# Altium PCB PD.PcbDoc
Units mil, origin at the board's own origin, x right, y up, seen from the top; angles counter-clockwise.
Board outline 1528 x 1869 mil, 2 copper layers (Top Layer, Bottom Layer), stack 12.8 mil thick; 65 components, 43 nets, 225 pads, 107 vias.
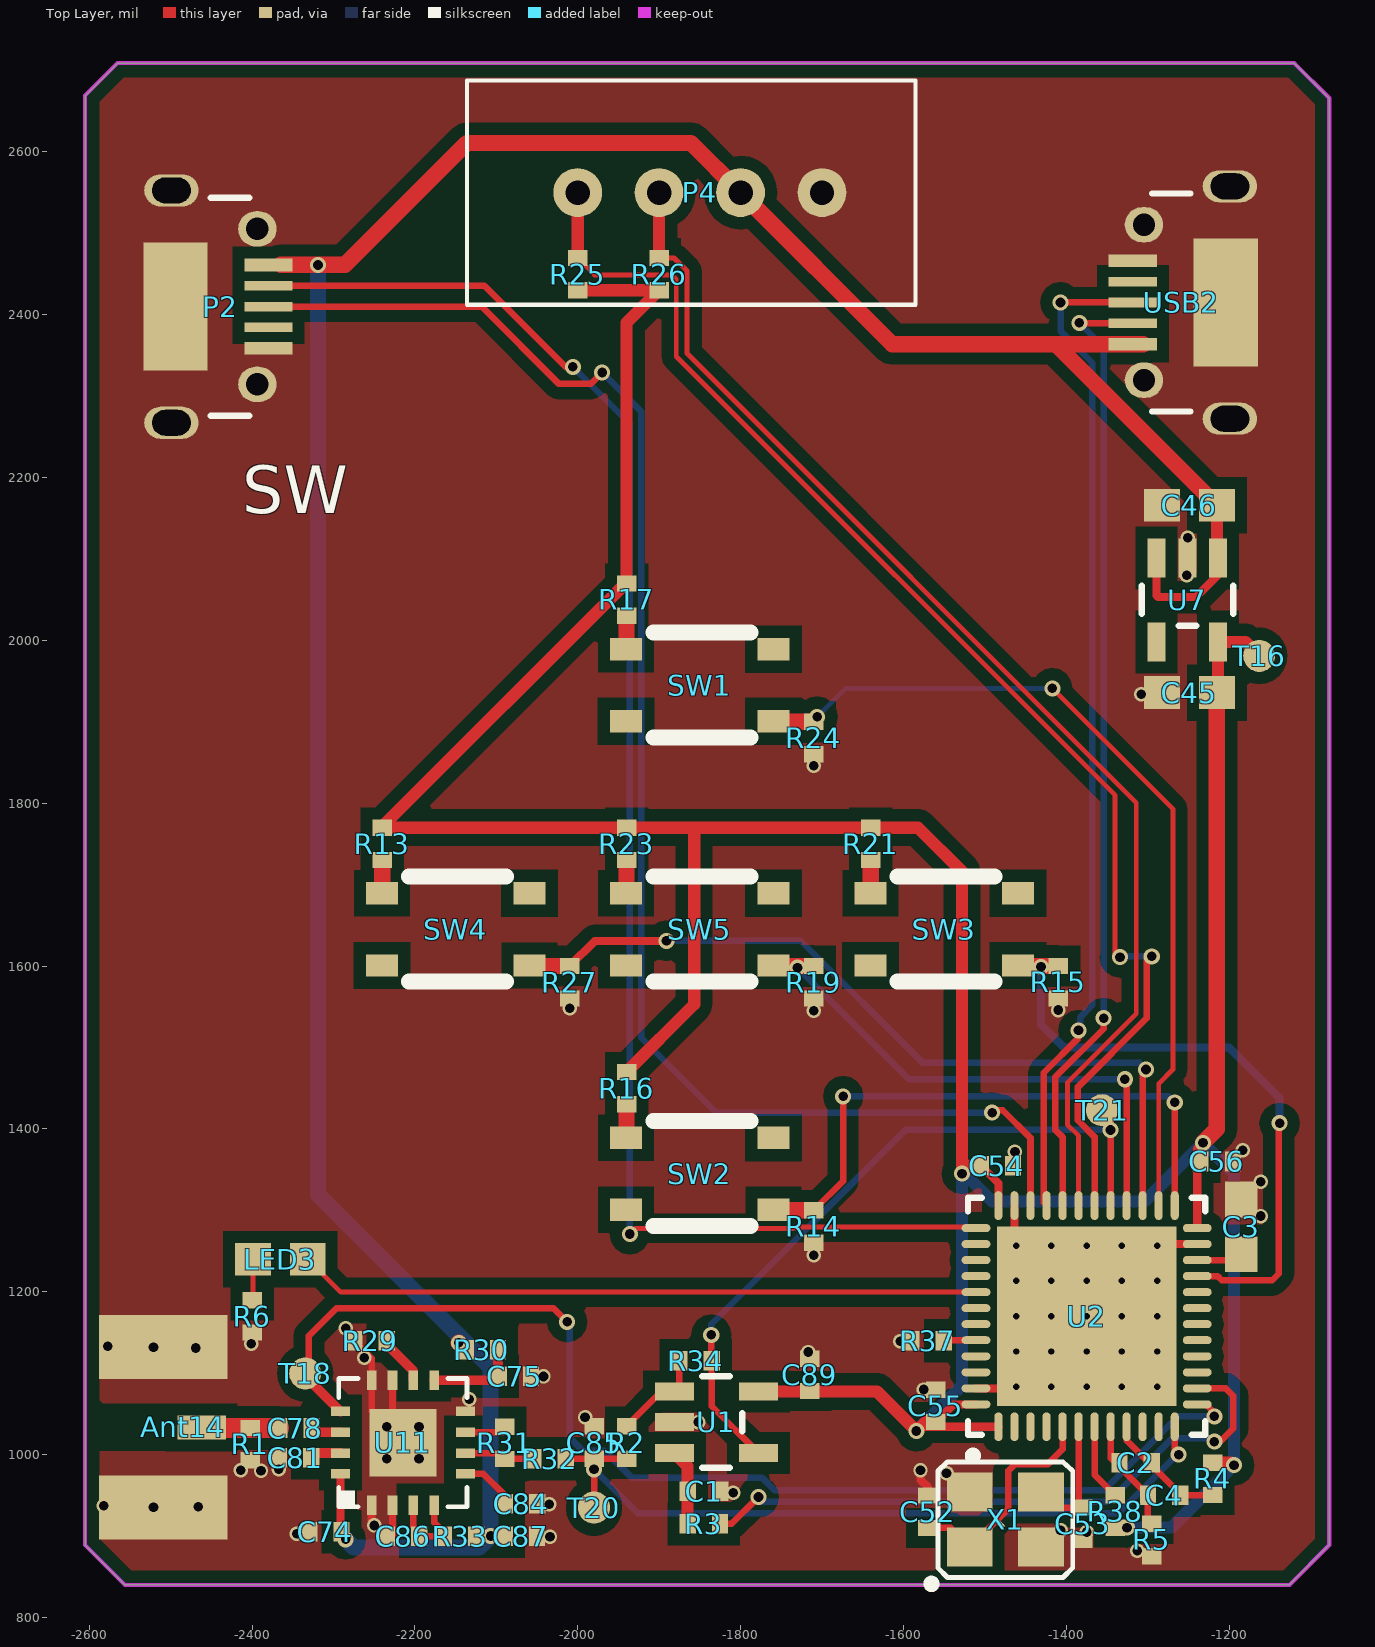
[diagram p0: Top Layer view]
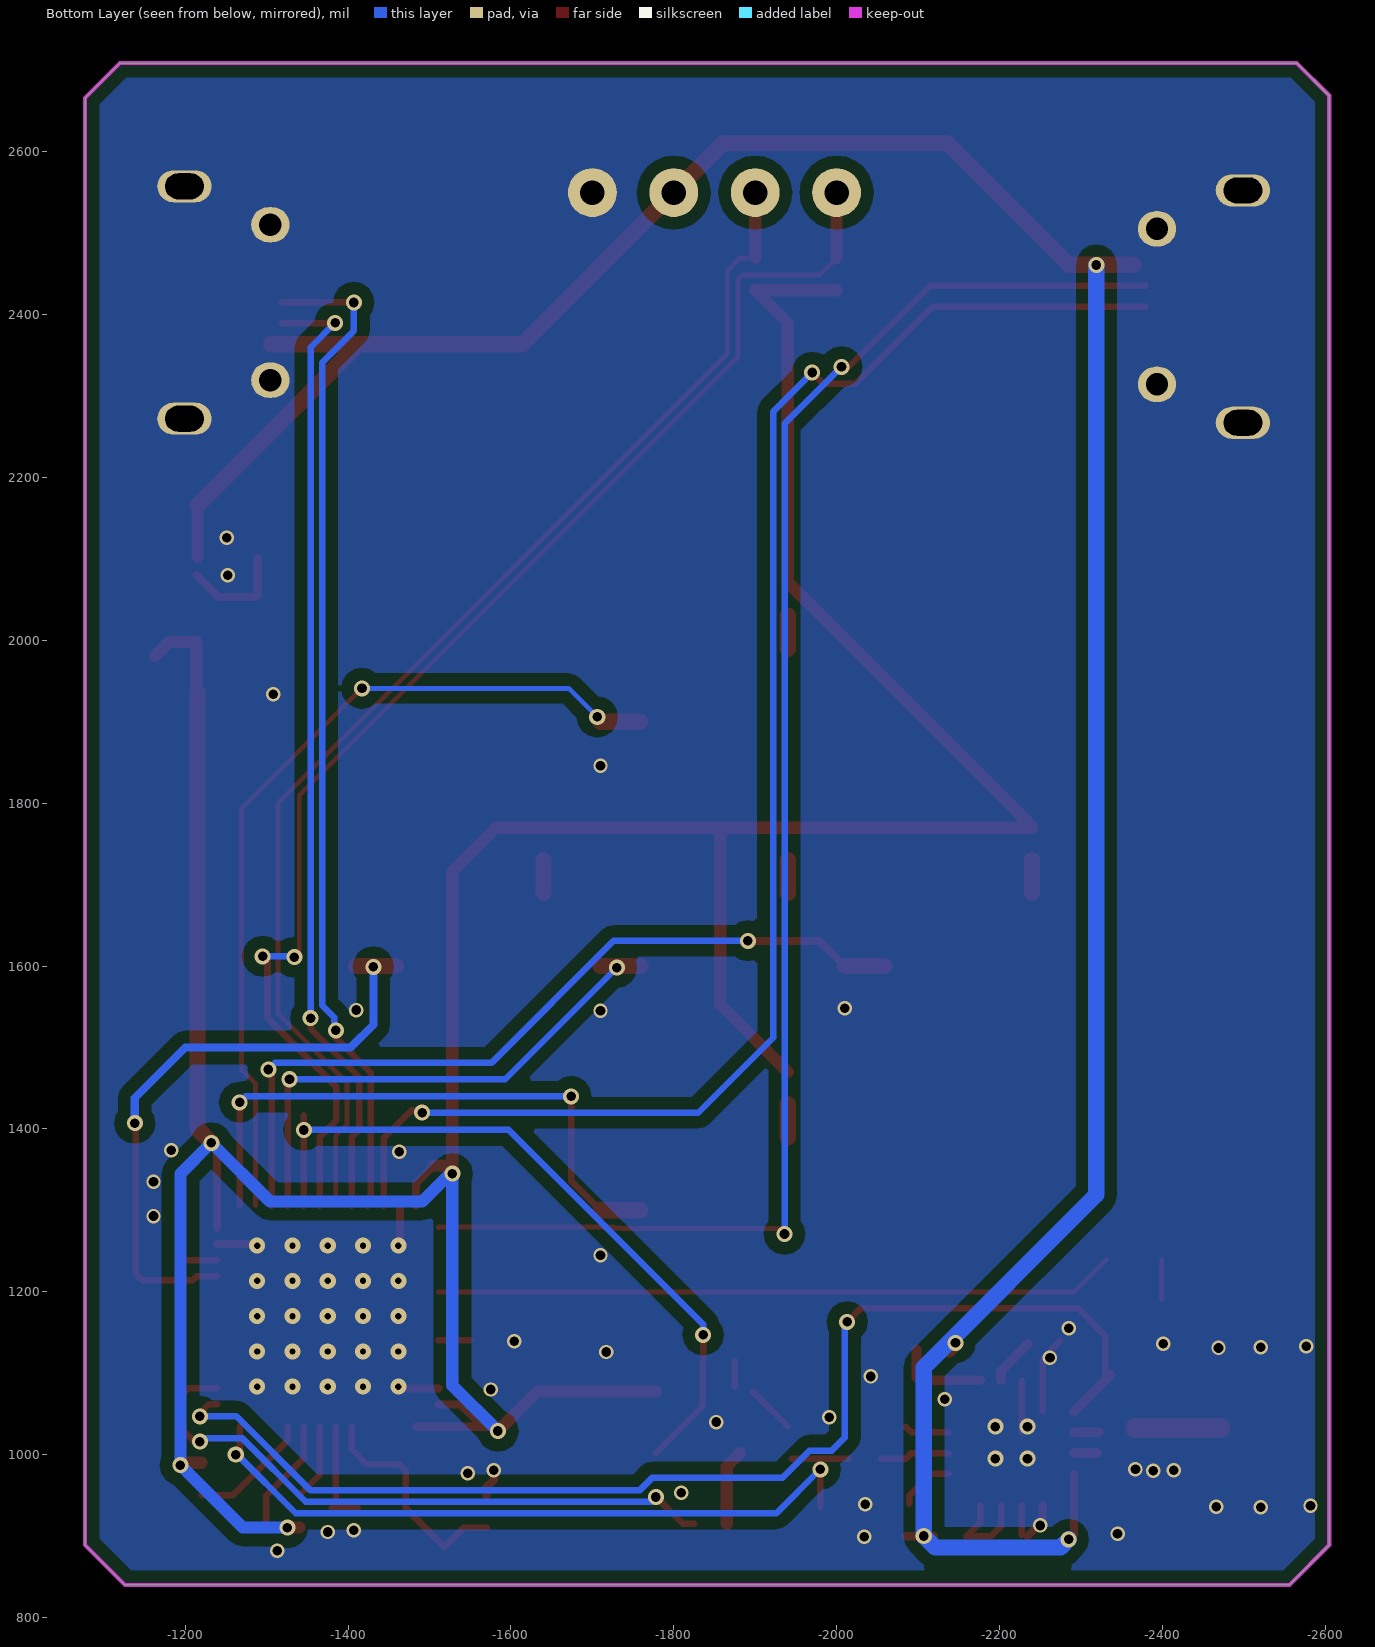
[diagram p1: Bottom Layer view, seen from below]

## Layer stack, top to bottom
Top Solder: solder mask 0.4, Solder Resist, Dk 3.5
Top Layer: signal copper 1.4
Dielectric 1: core 10, FR-4, Dk 4.2
Bottom Layer: signal copper 1.4
Bottom Solder: solder mask 0.4, Solder Resist, Dk 3.5

## Board outline
-2605,889 -2605,2669 -2565,2709 -1120,2709 -1077,2666 -1077,889 -1126,840 -2556,840

## Design rules (kind name [scope] priority, off if disabled: settings)
Clearance Clearance_1 [(InNamedPolygon('Bottom Layer-No Net')) vs Not InNet('GND')] p1: gap=15 ignorepadtopadclearanceinfootprint=FALSE except(0: Arc-Hole Track-Hole SMDPad-Hole THPad-Hole Via-Hole Fill-Hole Poly-Hole Region-Hole Text-Hole)
Clearance [All] p2: gap=6 ignorepadtopadclearanceinfootprint=FALSE except(0: Arc-Hole Track-Hole SMDPad-Hole THPad-Hole Via-Hole Fill-Hole Poly-Hole Region-Hole Text-Hole)
DiffPairsRouting [All] p1: maxlimit=10 minlimit=10 mostfreqgap=10 toplayer_minwidth=5.98 toplayer_maxwidth=15 toplayer_prefwidth=15 bottomlayer_minwidth=5.98 bottomlayer_maxwidth=15 bottomlayer_prefwidth=15 maxuncoupledlength=500
MinimumSolderMaskSliver [All] p1 off: minsoldermaskwidth=10
PlaneClearance [All] p1: clearance=10
PlaneConnect [All] p1: planeconnectstyle=Direct reliefexpansion=20 reliefentries=4 reliefconductorwidth=10 reliefairgap=10
PolygonConnect [All] p1: connectstyle=Direct reliefconductorwidth=10 reliefentries=4 polygonreliefangle="90 Angle" airgapwidth=10
RoomDefinition Detector [InComponentClass('Detector')] p1 off: confinementstyle=ConfineIn formatcopy=TRUE lockcomponents=FALSE outline -1032,1519 6547,1519 6547,1914 -1032,1914
RoomDefinition MCU [InComponentClass('MCU')] p2 off: confinementstyle=ConfineIn formatcopy=TRUE lockcomponents=FALSE outline -595,900 1750,900 1750,1140 -595,1140
RoutingVias [All] p1: holewidth=12 width=20 viastyle="Through Hole" minholewidth=11.81 minwidth=19.68 maxholewidth=28 maxwidth=50
SilkToBoardRegionClearance [All] p1 off:
SilkToSilkClearance [All] p1 off: silktosilkclearance=10
SilkToSolderMaskClearance [IsPad] p1 off: minsilkscreentomaskgap=10 clearancetoexposedcopper=TRUE
SolderMaskExpansion [All] p1: expansion=4
Width [All] p1: maxlimit=60 minlimit=6 preferedwidth=6
23 further rules are at their usual default settings.

## Classes and differential pairs
component class MCU: C2 C3 C4 C45 C46 C52 C53 C54 C55 C56 LED3 P2 P4 R4 R5 R6 R13 R14 R15 R16 R17 R19 R21 R23 R24 R25 R26 R27 R28 R37 R38 SW1 SW2 SW3 SW4 SW5 T16 U2 U7 USB2 X1
component class Detector: Ant14 C1 C74 C75 C78 C81 C84 C85 C86 C87 C89 R1 R2 R3 R29 R30 R31 R32 R33 R34 T18 T20 T21 U1 U11

## Components (designator, comment, footprint, x,y, rotation, side; value= is the part's Value field where it differs from the comment)
Ant14 "Antenna" SMA-2 -2509,1132 r270 top
C1 "Cap" 0402 -1845,955 r0 top value=NC
C2 "Cap" 0402 -1315,990 r0 top value=0.1uF
C3 "Cap" 0603 -1185,1280 r270 top value=4.7uF
C4 "Cap" 0402 -1280,950 r0 top value=0.1uF
C45 "4.7uF" 0603 -1249,1936 r0 top
C46 "4.7uF" 0603 -1249,2166 r0 top
C52 "Cap" 0402 -1570,930 r270 top value=20pF
C53 "Cap" 0402 -1380,915 r90 top value=20pF
C54 "Cap" 0402 -1485,1355 r180 top value=0.1uF
C55 "Cap" 0402 -1560,1060 r270 top value=0.1uF
C56 "Cap" 0402 -1215,1360 r180 top value=0.1uF
C74 "Cap" 0402 -2310,905 r0 top value=0.1uF
C75 "Cap" 0402 -2077,1096 r180 top value=100pF
C78 "Cap" 0402 -2346.68,1032.68 r180 top value=1nF
C81 "Cap" 0402 -2347,996 r180 top value=1nF
C84 "Cap" 0402 -2069.68,939.68 r0 top value=NC
C85 "Cap" 0402 -1979.68,1014.68 r90 top value=NC
C86 "Cap" 0402 -2214.68,899.68 r0 top value=100pF
C87 "Cap" 0402 -2069.68,899.68 r180 top value=0.1uF
C89 "Cap" 0402 -1715,1098 r270 top value=0.1uF
LED3 "LED0" 0603 -2365,1240 r180 top
P2 "SWD_MicroUSB" MICRO-YZX -2610,2410 r270 top
P4 "UART/I2C" 4pSocket -1900,2550 r0 top
R1 "Res2" 0402 -2402,1013 r270 top value=52.3R
R2 "Res2" 0402 -1940,1015 r270 top value=1k
R3 "Res2" 0402 -1845,915 r180 top value=0R
R4 "0R/FB" 0402 -1220,970 r90 top
R5 "0R/FB" 0402 -1295,895 r90 top
R6 "10k" 0402 -2400,1170 r270 top value=0Ohm
R13 "1k" 0402 -2240,1750 r90 top value=0Ohm
R14 "10k" 0402 -1710,1280 r90 top value=0Ohm
R15 "10k" 0402 -1410,1580 r90 top value=0Ohm
R16 "1k" 0402 -1940,1450 r90 top value=0Ohm
R17 "1k" 0402 -1940,2050 r90 top value=0Ohm
R19 "10k" 0402 -1710,1580 r90 top value=0Ohm
R21 "1k" 0402 -1640,1750 r90 top value=0Ohm
R23 "1k" 0402 -1940,1750 r90 top value=0Ohm
R24 "10k" 0402 -1710,1880 r90 top value=0Ohm
R25 "10k" 0402 -2000,2450 r270 top value=0Ohm
R26 "10k" 0402 -1900,2450 r270 top value=0Ohm
R27 "10k" 0402 -2010,1580 r90 top value=0Ohm
R29 "Res2" 0402 -2254.68,1139.68 r0 top value=10k
R30 "Res2" 0402 -2118,1129 r0 top value=0R/FB
R31 "Res2" 0402 -2089.68,1014.68 r270 top value=0R
R32 "Res2" 0402 -2034.68,994.68 r0 top value=0R
R33 "Res2" 0402 -2144.68,899.68 r0 top value=0R/FB
R34 "Res2" 0402 -1855,1115 r180 top value=10k
R37 "Res2" 0402 -1570,1140 r180 top value=10k
R38 "Res2" 0402 -1340,930 r90 top value=10k
SW1 "SW-PB" SW3x4 -1850,1945 r180 top
SW2 "SW-PB" SW3x4 -1850,1345 r180 top
SW3 "SW-PB" SW3x4 -1550,1645 r180 top
SW4 "SW-PB" SW3x4 -2150,1645 r180 top
SW5 "SW-PB" SW3x4 -1850,1645 r180 top
T16 "TestPad" "TestPad - 1mm" -1163,1981 r180 top
T18 "TestPad" "TestPad - 1mm" -2334.68,1099.68 r90 top
T20 "TestPad" "TestPad - 1mm" -1980,935 r270 top
T21 "TestPad" "TestPad - 1mm" -1356,1423 r270 top
U1 "OP-SOT23" SOT23-5 -1830,1040 r270 top
U2 "STM32F401CCU6" STM-UFQFPN48_N -1375,1170 r90 top
U7 "LP5907" SOT23-5 -1251,2050 r180 top
U11 "AD8318" AD8318 -2214.68,1014.68 r90 top
USB2 "USB Micro Type B" MICRO-YZX -1088,2415 r90 top
X1 "24.000 KHz 3.2x2.5mm 8-10pf" OSCILLATOR-3.2X2.5 -1475,920 r0 top

## Footprints (in the part's own frame and the unit in brackets; to place one, negate y for a bottom-side part, rotate by r counter-clockwise, add the part's x,y. Pads: shape width x height; smd on the part's side, far side on the other; paste and mask are expansions set on the pad)
4pSocket [mil]
  round 60 hole 30: 1(-100,0) 2(0,0) 3(100,0) 4(200,0)
  silkscreen extent -236,-138 315,138
0402 [mil] "0402-RES"
  rect 20x24 smd: 1(-19.68,0) 2(20,0)
0603 [mil] "0603-RES"
  rect 44x40 smd: 1(-33.46,0) 2(34,0)
AD8318 [mm]
  rect 2.1x2.1 smd: 0(0,0)
  rect 0.6x0.3 smd: 1(-1.95,0.975) 2(-1.95,0.325) 3(-1.95,-0.325) 4(-1.95,-0.975) 9(1.95,-0.975) 10(1.95,-0.325) 11(1.95,0.325) 12(1.95,0.975)
  rect 0.3x0.6 smd: 5(-0.975,-1.95) 6(-0.325,-1.95) 7(0.325,-1.95) 8(0.975,-1.95) 13(0.975,1.95) 14(0.325,1.95) 15(-0.325,1.95) 16(-0.975,1.95)
  silkscreen extent -2,-2 2,2, body extent -2,-2 2,2, height 0.6
MICRO-YZX [mm]
  rect 0.4x1.5 smd: 1(-1.3,5.85) 5(1.3,5.85)
  rect 0.3x1.5 smd: 2(-0.65,5.85) 3(0,5.85) 4(0.65,5.85)
  oval 1x1.7 hole 0.8 slot 1.2 at 90 deg: 5(-3.625,2.82) 5(3.625,2.82)
  oval 1.1x1.2 hole 0.7: 5(-2.425,5.5) 5(2.425,5.5)
  rect 4x2 smd: 5(0,2.95)
  silkscreen extent -3.4,4.05 3.4,5.25, body extent -4.02,0.33 3.98,5.93, height 2.6
OSCILLATOR-3.2X2.5 [mil] "OSCILLATOR-3.2X2.5"
  rect 56x48 smd: 1(-43.31,-33.46) 2(44,-33.46) 3(44,34) 4(-43.31,34)
  silkscreen extent -95,-83 83,71
SMA-2 [mm]
  rect 0.75x1.5 smd: 1(2.5,1.2)
  rect 2x4 smd: GND(0,0) GND(5,0)
SOT23-5 [mil] "SOT23-5"
  rect 22x48 smd: 1(-37.4,-51.19) 2(0,-51.19) 3(38,-51.19) 4(38,52) 5(-37.4,52)
  silkscreen extent -56,-17 56,32
STM-UFQFPN48_N [mm] "QFN, 48-Leads, Body 7.1x7.1mm, Pitch 0.5mm, Thermal Pad 5.6x5.6mm, IPC Medium Density"
  oval 0.9x0.25 smd: 1(-3.45,2.75) 2(-3.45,2.25) 3(-3.45,1.75) 4(-3.45,1.25) 5(-3.45,0.75) 6(-3.45,0.25) 7(-3.45,-0.25) 8(-3.45,-0.75) 9(-3.45,-1.25) 10(-3.45,-1.75) 11(-3.45,-2.25) 12(-3.45,-2.75) 25(3.45,-2.75) 26(3.45,-2.25) 27(3.45,-1.75) 28(3.45,-1.25) 29(3.45,-0.75) 30(3.45,-0.25) 31(3.45,0.25) 32(3.45,0.75) 33(3.45,1.25) 34(3.45,1.75) 35(3.45,2.25) 36(3.45,2.75)
  oval 0.25x0.9 smd: 13(-2.75,-3.45) 14(-2.25,-3.45) 15(-1.75,-3.45) 16(-1.25,-3.45) 17(-0.75,-3.45) 18(-0.25,-3.45) 19(0.25,-3.45) 20(0.75,-3.45) 21(1.25,-3.45) 22(1.75,-3.45) 23(2.25,-3.45) 24(2.75,-3.45) 37(2.75,3.45) 38(2.25,3.45) 39(1.75,3.45) 40(1.25,3.45) 41(0.75,3.45) 42(0.25,3.45) 43(-0.25,3.45) 44(-0.75,3.45) 45(-1.25,3.45) 46(-1.75,3.45) 47(-2.25,3.45) 48(-2.75,3.45)
  rect 5.6x5.6 smd: 49(0,0)
  silkscreen extent -4.47,-3.7 3.7,3.7, body extent -3.55,-3.55 3.55,3.55, height 0.6
SW3x4 [mm]
  rect 1x0.7 smd: 1(-2.3,1.125) 2(2.3,-1.125) 3(2.3,1.125) 4(-2.3,-1.125)
  silkscreen extent -1.58,-1.65 1.45,1.63, body extent -2,-1.5 2,1.5, height 2.6
"TestPad - 1mm" [mm]
  round 1 smd: 1(0,0)

## Part data
C1 C2 C3 C4 C52 C53 C54 C55 C56 C74 C75 C78 C81 C84 C85 C86 C87 C89: "Capacitor", LatestRevisionDate=17-Jul-2002, LatestRevisionNote="Re-released for DXP Platform.", PackageDescription="Radial Cap, Thru-Hole; 2 Leads; 0.3 in Pin Spacing", PackageReference=RAD-0.3, Published=8-Jun-2000, Publisher="Altium Limited"
C45 C46: library part Cap, "Capacitor", LatestRevisionDate=17-Jul-2002, LatestRevisionNote="Re-released for DXP Platform.", PackageDescription="Radial Cap, Thru-Hole; 2 Leads; 0.3 in Pin Spacing", PackageReference=RAD-0.3, Published=8-Jun-2000, Publisher="Altium Limited"
LED3: "Typical INFRARED GaAs LED", LatestRevisionDate=08-Jul-2005, LatestRevisionNote="Mech Layer 1 removed.", PackageDescription="LED; 2 Leads", PackageReference=LED-0, Published=8-Jun-2000, Publisher="Altium Limited"
P2: "Connector SMD USB Micro Type B middle mount", Manufacturer 1="Molex Inc", Package / Case=SMD, Supplier Part Number 1=WM17142CT-ND, SCDType=undef, Supplier 1=Digi-Key
P4: library part 4PSocket
R1 R2 R3 R29 R30 R31 R32 R33 R34 R37 R38: "Resistor", LatestRevisionDate=17-Jul-2002, LatestRevisionNote="Re-released for DXP Platform.", PackageDescription="Axial Device, Thru-Hole; 2 Leads; 0.4 in Pin Spacing", PackageReference=AXIAL-0.4, Published=8-Jun-2000, Publisher="Altium Limited"
R4 R5 R6 R13 R14 R15 R16 R17 R19 R21 R23 R24 R25 R26 R27: library part Res2, "Resistor", LatestRevisionDate=17-Jul-2002, LatestRevisionNote="Re-released for DXP Platform.", PackageDescription="Axial Device, Thru-Hole; 2 Leads; 0.4 in Pin Spacing", PackageReference=AXIAL-0.4, Published=8-Jun-2000, Publisher="Altium Limited"
SW1 SW2 SW3 SW4 SW5: "Switch", LatestRevisionDate=17-Jul-2002, LatestRevisionNote="Re-released for DXP Platform.", PackageDescription="Switch; 2 Leads", PackageReference=SPST-2, Published=24-Mar-1999, Publisher="Altium Limited"
U2: "ARM Cortex-M4 32-bit MCU+FPU, 105 DMIPS, 256 kB Flash, 64 kB Internal RAM, 36 I/Os, 48-pin UFQFPN, -40 to 85 degC, Tray", I/Os (High Current)=36, Manufacturer=STMicroelectronics, Operating Frequency(F) (Processor speed) (MHz)=84, Supplier Part Number 1=19X6217, Supply Voltage(Vcc) max (V)=3.6, Supply Voltage(Vcc) min (V)=1.8, ComponentLink1Description="Manufacturer URL", ComponentLink1URL=http://www.st.com/web/en/home.html, ComponentLink2Description=Datasheet, ComponentLink2URL=http://www.st.com/st-web-ui/static/active/en/resource/technical/document/data_brief/DM00071938.pdf, ComponentLink3Description="Package Specification", ComponentLink3URL=http://www.st.com/st-web-ui/static/active/en/resource/technical/document/data_brief/DM00071938.pdf, Core="ARM Cortex-M4", DatasheetVersion="Rev. 1", FLASH Size (Prog) (kB)=256, Internal RAM Size (kB)=64, Mounting Technology="Surface Mount", PackageDescription="48-Pin Ultra Thin Fine Pitch Quad Flat No-Lead, 7 x 7 x 0.6 mm Body, 0.5 mm Pitch, Exposed Pad", PackageReference=UFQFPN48, PackageVersion="Rev. 1, 04/2013", Packing=Tray, PartNumber=STM32F401CCU6, Supplier 1=Newark, Supplier 2=Mouser, Supplier Part Number 2=511-STM32F401CCU6
USB2: library part USB_Micro_TypeB, "Connector SMD USB Micro Type B middle mount", Manufacturer 1="Molex Inc", Manufacturer Part Number 1=47491-0001, Package / Case=SMD, Supplier Part Number 1=WM17142CT-ND, SCDType=undef, Supplier 1=Digi-Key
X1: library part OSCILLATOR-3.2X2.5, "Crystal Oscillator in 3.2x2.5 SMD"

## Via types
v1: diameter 19.68, hole 11.81, Top Layer to Bottom Layer, 41 vias
v2: diameter 17.72, hole 11.81, Top Layer to Bottom Layer, 41 vias
v3: diameter 19.68, hole 7.87, Top Layer to Bottom Layer, 25 vias

## Nets (pads, with @x,y where several pads share a name; then routed paths per layer and width w, separated by ;. In a path a pad name is that pad's centre, name@x,y a point inside that pad or via, vN(x,y) a via of type N, cw(c..) or ccw(c..) an arc to the next point about the centre after c; other vN are vias at no path point)
3.3D: C45.2 C54.2 C55.2 C56.2 C89.2 R4.2 R13.2 R16.2 R17.2 R21.2 R23.2 R25.2 R26.2 R38.1 T16.1 U1.5 U2.1 U2.24 U2.36 U2.48 U7.5 | length 4903.5
  Top Layer w10: v1@-1578.83,1034.17 U2.1 ; C55.2 -1538.27,1061.73 U2.48 ; C54.2 -1483.27,1333.27 U2.36 ; U2.24 -1239.17,1375.83 v1(-1232,1383)
  Top Layer w15: R13.2 R23.2 R21.2 -1582,1770 -1528,1716 v1(-1528,1345) -1518,1355 C54.2 ; R13.2@-2240,1771.41 -1941.41,2070 R17.2 -1940,2390 R26.2 R25.2 ; R16.2 -1857,1553 -1857,1770 ; U1.5 -1632.4,1077.4 v1(-1584,1029) -1578.83,1034.17 -1573,1040 C55.2 ; R38.1 v1(-1325.31,910.32) ; R4.2 -1197,990 v1(-1194,987) ; C45.2@-1213.6,1937.4 U7.5 -1180,1998 T16.1
  Top Layer w20: v1(-1232,1383) -1215,1400 C45.2
  Bottom Layer w15: v1(-1584,1029) -1528,1085 v1(-1528,1345) -1525,1345 -1491,1311 -1304,1311 v1(-1232,1383) -1194,1345 v1(-1194,987) -1270.69,910.32 v1(-1325.31,910.32)
5V: C46.2 C74.2 C87.2 P2.1 P4.3 R30.1 R33.2 U7.1 U7.3 U11.16 USB2.1 | length 3659
  Top Layer w10: C74.2@-2291.46,901.46 U11.16 ; R33.2@-2119.68,899.68 C87.2 C87.2@-2084.68,899.68 ; U7.3 -1289,2055 -1287.16,2053.16 -1240.84,2053.16 U7.1@-1213.6,2080.4
  Top Layer w15: U7.1@-1215,2102.59 C46.2
  Top Layer w20: P2.1@-2364.68,2461.18 -2285.82,2461.18 -2136,2611 -1861,2611 P4.3 -1613.82,2363.82 USB2.1@-1305.31,2363.82 ; v1(-2146,1137.32) R30.1 ; -1412.82,2363.82 C46.2
  Bottom Layer w20: v1(-2319,2461) -2319,1319 -2107,1107 v1(-2107,900) -2121,886 -2275,886 v1(-2285,896)
AGND: C2.1 C4.1 R5.2 U2.8 | length 133.5
  Top Layer w8: U2.8 -1345.47,995.79 C4.1 R5.2@-1299.69,919.68
GND: Ant14.GND C1.2 C3.1 C45.1 C46.1 C52.1 C53.1 C54.1 C55.1 C56.1 C74.1 C75.1 C81.2 C84.2 C85.2 C86.1 C87.1 C89.1 P2.5 P4.4 R1.2 R5.1 R6.2 R14.1 R15.1 R19.1 R24.1 R27.1 R29.1 R37.2 U1.2 U2.23 U2.35 U2.47 U2.49 U7.2 U11.0 U11.1 U11.2 U11.8 U11.11 U11.12 USB2.5 X1.2 X1.4 | length 418.5
  Top Layer w8: R29.1 -2253.07,1118.39 U11.12 U11.0@-2253.07,1053.07 ; C86.1@-2227.48,901.57 U11.2 ; U11.0@-2227.48,1027.48 U11.11
  Top Layer w10: U11.1 -2253.07,918.39 C86.1 ; v2(-1579,981) -1579,969 -1570,960 C52.1 ; U2.47 U2.49@-1463.58,1081.42 ; U2.49@-1463.58,1258.58 U2.35 ; U2.49@-1286.42,1258.58 U2.23
  other v1: -2234.37,995 -2195,995 -2234.37,1034.37 -2195,1034.37
  other v2: -1313,882 -2034,899 -2345,903 -1375,905 -1407,907 -2250,913 -2521,935.15 -2466,936 -2582,937 -2035,939 -1809,953 -1547,977 -2389,980 -2414,981 -2367,982 -1852,1040 -1991,1046 -2133,1068 -1575,1080 -2042,1096 -2262,1119 -1717,1126 -2469,1131 -2521,1132 -2577,1133 -2401,1136 -1604,1139 -2285,1155 -1710,1245 -1161,1293 -1161,1335 -1463,1372 -1183,1374 -1710,1545 -1410,1546 -2010,1548 -1710,1846 -1308,1934 -1252,2080 -1251,2126
  other v3: -1461.61,1083.39 -1418.31,1083.39 -1375,1083.39 -1331.69,1083.39 -1288.39,1083.39 -1461.61,1126.69 -1418.31,1126.69 -1375,1126.69 -1331.69,1126.69 -1288.39,1126.69 -1461.61,1170 -1418.31,1170 -1375,1170 -1331.69,1170 -1288.39,1170 -1461.61,1213.31 -1418.31,1213.31 -1375,1213.31 -1331.69,1213.31 -1288.39,1213.31 -1461.61,1256.61 -1418.31,1256.61 -1375,1256.61 -1331.69,1256.61 -1288.39,1256.61
KEY1: R15.2 SW3.1 U2.21 | length 770.7
  Top Layer w8: U2.21 -1214.35,1219.21 -1209.14,1214 -1147,1214 -1139,1222 v1@-1139,1406
  Top Layer w20: SW3.1@-1458.74,1600 R15.2
  Bottom Layer w10: v1(-1431,1599) -1431,1528 -1403,1500 -1200,1500 -1138,1438 v1(-1138,1407)
KEY2: R14.2 SW2.1 U2.25 | length 740.8
  Top Layer w8: R14.2 -1674,1336 v1(-1674,1440) ; U2.25 v1(-1266.73,1432.73)
  Top Layer w20: SW2.1@-1758.74,1300 R14.2
  Bottom Layer w8: v1(-1674,1440) -1673.84,1439.84 -1273.84,1439.84 v1(-1266.73,1432.73)
KEY3: R24.2 SW1.1 U2.26 | length 1055.9
  Top Layer w6: v1(-1417,1941) -1269,1793 -1269,1473 -1286.42,1455.58 U2.26
  Top Layer w20: SW1.1@-1758.74,1900 R24.2
  Bottom Layer w6: v1(-1706,1906) -1671,1941 v1(-1417,1941)
KEY4: R27.2 SW4.1 U2.27 | length 1006.9
  Top Layer w8: U2.27 -1306.1,1468.9 v1(-1302,1473)
  Top Layer w10: R27.2 -1979,1631 v1(-1891,1631)
  Top Layer w20: SW4.1@-2058.74,1600 R27.2
  Bottom Layer w8: v1(-1891,1631) -1726,1631 -1576,1481 -1310,1481 v1(-1302,1473) v1@-1299,1473
KEY5: R19.2 SW5.1 U2.28 | length 663.6
  Top Layer w8: v1(-1328,1461) -1325.79,1458.79 U2.28
  Top Layer w20: SW5.1@-1758.74,1600 R19.2
  Bottom Layer w8: v1(-1730,1598) -1593,1461 v1(-1328,1461)
LED: LED3.1 U2.41 | length 837.5
  Top Layer w6: LED3.1 -2291.06,1199.53 U2.41
NetAnt14_1: Ant14.1 C78.2 R1.1 | length 105.2
  Top Layer w24: Ant14.1@-2471.87,1032.68 C78.2
NetC1_1: C1.1 R3.2 U1.3 | length 93.7
  Top Layer w15: U1.3 -1865,985.81 R3.2
NetC2_2: C2.2 C4.2 R4.1 U2.9 | length 150.4
  Top Layer w8: U2.9 -1325.79,1017.24 -1258.86,950.32 R4.1
NetC3_2: C3.2 U2.22 | length 47.1
  Top Layer w8: U2.22 C3.2@-1192.1,1238.9
NetC52_2: C52.2 U2.5 X1.1 | length 279.7
  Top Layer w8: C52.2 -1541.77,910 X1.1 -1471,933.84 -1471,980.14 -1463.14,988 -1423,988 -1404.53,1006.47 U2.5
NetC53_2: C53.2 U2.6 X1.3 | length 126.3
  Top Layer w8: X1.3@-1412,935 C53.2 ; C53.2@-1384.84,939.84 U2.6
NetC75_2: C75.2 R30.2 U11.9 | length 113.8
  Top Layer w12: U11.9 -2101.54,1091.46 -2098,1095 R30.2
NetC78_1: C78.1 U11.14 | length 30.3
  Top Layer w12: C78.1@-2321.8,1027.48 U11.14
NetC81_1: C81.1 U11.15 | length 28.3
  Top Layer w12: C81.1@-2319.8,1001.89 U11.15
NetC84_1: C84.1 U11.5 | length 69.6
  Top Layer w8: U11.5 -2115.98,976.3 -2089.37,949.68 C84.1
NetC86_2: C86.2 R33.1 U11.3 U11.4 | length 118.8
  Top Layer w8: U11.3 -2201.89,911.89 -2189.68,899.68 -2159.37,899.68 -2176.3,916.61 U11.4
NetLED3_2: LED3.2 R6.1 | length 49.3
  Top Layer w6: R6.1@-2399,1190.68 LED3.2
NetR2_1: R2.1 R34.2 U1.1 | length 91.8
  Top Layer w8: R2.1 U1.1@-1897.28,1077.4 ; U1.1@-1875,1083.59 R34.2
NetR3_1: R3.1 U2.14 | length 778.5
  Top Layer w8: R3.1 -1811,915 v1(-1778,948) ; U2.14 -1204.42,1081.42 -1195,1072 -1195,1032 -1211,1016 v1(-1218,1016)
  Bottom Layer w8: v1(-1778,948) -1778,942 -1348.06,942 -1270.22,1019.84 -1221.84,1019.84 v1(-1218,1016)
NetR13_1: R13.1 SW4.2 | length 40.5
  Top Layer w20: SW4.2@-2240,1689.84 R13.1
NetR16_1: R16.1 SW2.2 | length 40.5
  Top Layer w20: SW2.2@-1940,1389.84 R16.1
NetR17_1: R17.1 SW1.2 | length 40.5
  Top Layer w20: SW1.2@-1940,1989.84 R17.1
NetR21_1: R21.1 SW3.2 | length 40.5
  Top Layer w20: SW3.2@-1640,1689.84 R21.1
NetR23_1: R23.1 SW5.2 | length 40.5
  Top Layer w20: SW5.2@-1940,1689.84 R23.1
NetR29_2: R29.2 U11.10 | length 57.8
  Top Layer w12: R29.2@-2234.68,1135.71 -2201.89,1102.92 U11.10
NetR31_1: R31.1 U11.7 | length 56.1
  Top Layer w8: U11.7 -2091.57,1027.48 R31.1@-2084.68,1034.37
NetR31_2: R31.2 R32.1 U11.6 | length 86.5
  Top Layer w8: U11.6 -2091.89,1001.89 -2084.68,994.68 R32.1
NetR34_1: R34.1 T21.1 U1.4 U2.29 | length 882.5
  Top Layer w8: R34.1@-1836,1115.68 v1(-1836,1147) ; R34.1 -1835.32,1059.32 U1.4 ; v1(-1345.63,1398.71) v1@-1345.47,1398.55 ; U2.29 v1@-1345.47,1398.55 ; v1@-1345.47,1400 v1@-1345.47,1398.71 ; T21.1@-1345.47,1416.53 v1@-1345.47,1398.71 ; v1@-1345.47,1398.55 v1@-1345.47,1398.71
  Bottom Layer w8: v1(-1836,1147) -1836,1160 -1597.29,1398.71 v1(-1345.63,1398.71)
NetR37_1: R37.1 U2.44 | length 39
  Top Layer w8: R37.1@-1549.84,1140.47 U2.44
NetR38_2: R38.2 U2.7 | length 94.6
  Top Layer w8: U2.7 -1365.16,975.16 R38.2
NetT18_1: T18.1 U2.13 U11.13 | length 1491.1
  Top Layer w8: T18.1@-2330.19,1091.81 -2330.19,1145.81 -2296,1180 -2030,1180 v1(-2013,1163) ; U2.13 -1228.73,1061.73 -1214,1047 v1(-1218,1047)
  Top Layer w12: T18.1@-2336.38,1097.99 -2330.19,1091.81 U11.13
  Bottom Layer w8: v1(-2013,1163) -2010,1160 -2010,1021 -1994,1005 -1967,1005 -1933.86,971.86 -1773.8,971.86 -1757.94,956 -1353.86,956 -1262.86,1047 v1(-1218,1047)
PA9: P4.1 R25.1 U2.30 | length 1667.8
  Top Layer w6: R25.1 -1979.32,2449 -1884.27,2449 -1879,2443.73 -1879,2348.69 -1340,1809.68 -1340,1611 v1(-1334,1611)
  Top Layer w8: U2.30 -1365.16,1390.18 -1385.69,1410.7 -1385.69,1451.49 -1301,1536.18 -1301,1612 v1(-1295,1612)
  Top Layer w15: R25.1 P4.1
  Bottom Layer w8: v1@-1333,1612 v1(-1295,1612)
PA10: P4.2 R26.1 U2.31 | length 1538.4
  Top Layer w6: R26.1 -1881.68,2469.69 -1865.67,2453.67 -1865.67,2352.33 -1314,1800.66 -1314,1541.56 -1398.69,1456.88 -1398.69,1405.32 -1384.84,1391.48 U2.31
  Top Layer w15: R26.1 P4.2
PA11: U2.32 USB2.2 | length 1193
  Top Layer w8: U2.32 -1404.53,1389.95 -1413.69,1399.11 -1413.69,1463.31 -1354,1523 v1(-1354,1536) ; v1(-1384,2390) -1384.41,2389.59 -1384.41,2389.41 USB2.2
  Bottom Layer w8: v1@-1385,2390 v1(-1384,2390) -1354,2360 v1(-1354,1536)
PA12: U2.33 USB2.3 | length 1244.2
  Top Layer w8: U2.33 -1427.69,1309.3 -1427.69,1469.11 -1385,1511.8 v1(-1385,1521) ; v1(-1407,2415) USB2.3
  Bottom Layer w8: v1(-1407,2415) -1407,2380 -1368,2341 -1368,1552 -1383,1537 -1383,1519 v1(-1385,1521)
PA13: P2.3 U2.34 | length 1901.1
  Top Layer w8: P2.3 -2118,2410 -2023,2315 -1984,2315 v1(-1970,2329) ; v1@-1487,1423 -1478,1423 -1443.9,1388.9 U2.34
  Bottom Layer w8: v1(-1970,2329) -1922,2281 -1922,1512 -1830,1420 v1(-1491,1420)
PA14: P2.2 U2.37 | length 1928.8
  Top Layer w6: v1@-1929.07,1277.93 -1736.04,1277.93 -1735.7,1278.27 -1726.78,1278.27 -1725.73,1279.32 -1510.83,1279.32 U2.37
  Top Layer w8: P2.2 -2114.59,2435.59 -2015,2336 v1(-2006,2336)
  Bottom Layer w8: v1(-2006,2336) -1936,2266 v1(-1936,1271)
VOUT: C85.1 R2.2 R32.2 T20.1 U2.12 | length 936
  Top Layer w8: R32.2 C85.1@-1979.68,994.68 ; T20.1@-1979.68,935.32 C85.1@-1979.68,994.68 ; C85.1 C85.1@-1979.68,994.68 ; R2.2@-1944.68,994.68 C85.1@-1979.68,994.68 ; U2.12 -1266.73,1004.73 v1(-1262,1000)
  Bottom Layer w8: v1(-1980,982) -1926,928 -1335.69,928 -1263.69,1000 v1(-1262,1000)
pads on no net: P2.4 SW1.3 SW1.4 SW2.3 SW2.4 SW3.3 SW3.4 SW4.3 SW4.4 SW5.3 SW5.4 U2.2 U2.3 U2.4 U2.10 U2.11 U2.15 U2.16 U2.17 U2.18 U2.19 U2.20 U2.38 U2.39 U2.40 U2.42 U2.43 U2.45 U2.46 U7.4 USB2.4

## Polygon pours and split planes (outlines as drawn)
GND on Bottom Layer "Bottom Layer-No Net" (solid, remove dead copper, pour order 2): -2666,2755 -2664,2757 -983,2757 -983,860 -1053,790 -1058,785 -2662,785
GND on Top Layer "Bottom Layer-No Net" (solid, remove dead copper, pour order 4): -2674,2762 -990,2762 -973,2745 -1026,2692 -1026,800 -2583,800 -2652,869

## Keep-outs
Keep-Out Layer:
  lines w5: -1077,889 -1077,2666 -1120,2709 -2565,2709 -2605,2669 -2605,889 -2556,840 -1126,840 -1077,889 ; -1077,889 -1077,889

## Other copper
Top Layer:
  pour cut-out: -2506.28,1063.34 -2506.28,1003.81 -2506.47,1004 -2596,1004 -2596,1062 -2595,1063

## Silkscreen, mask and mechanical layers (free items; w line width, h text height)
Top Overlay:
  text "SW" at -2412,2137 h100
Bottom Solder:
  rectangle: -2584,891 -2432,1177